# EAGLE board expansion-sn76489-kempton-sd-rev4 (EAGLE 9.6.2)
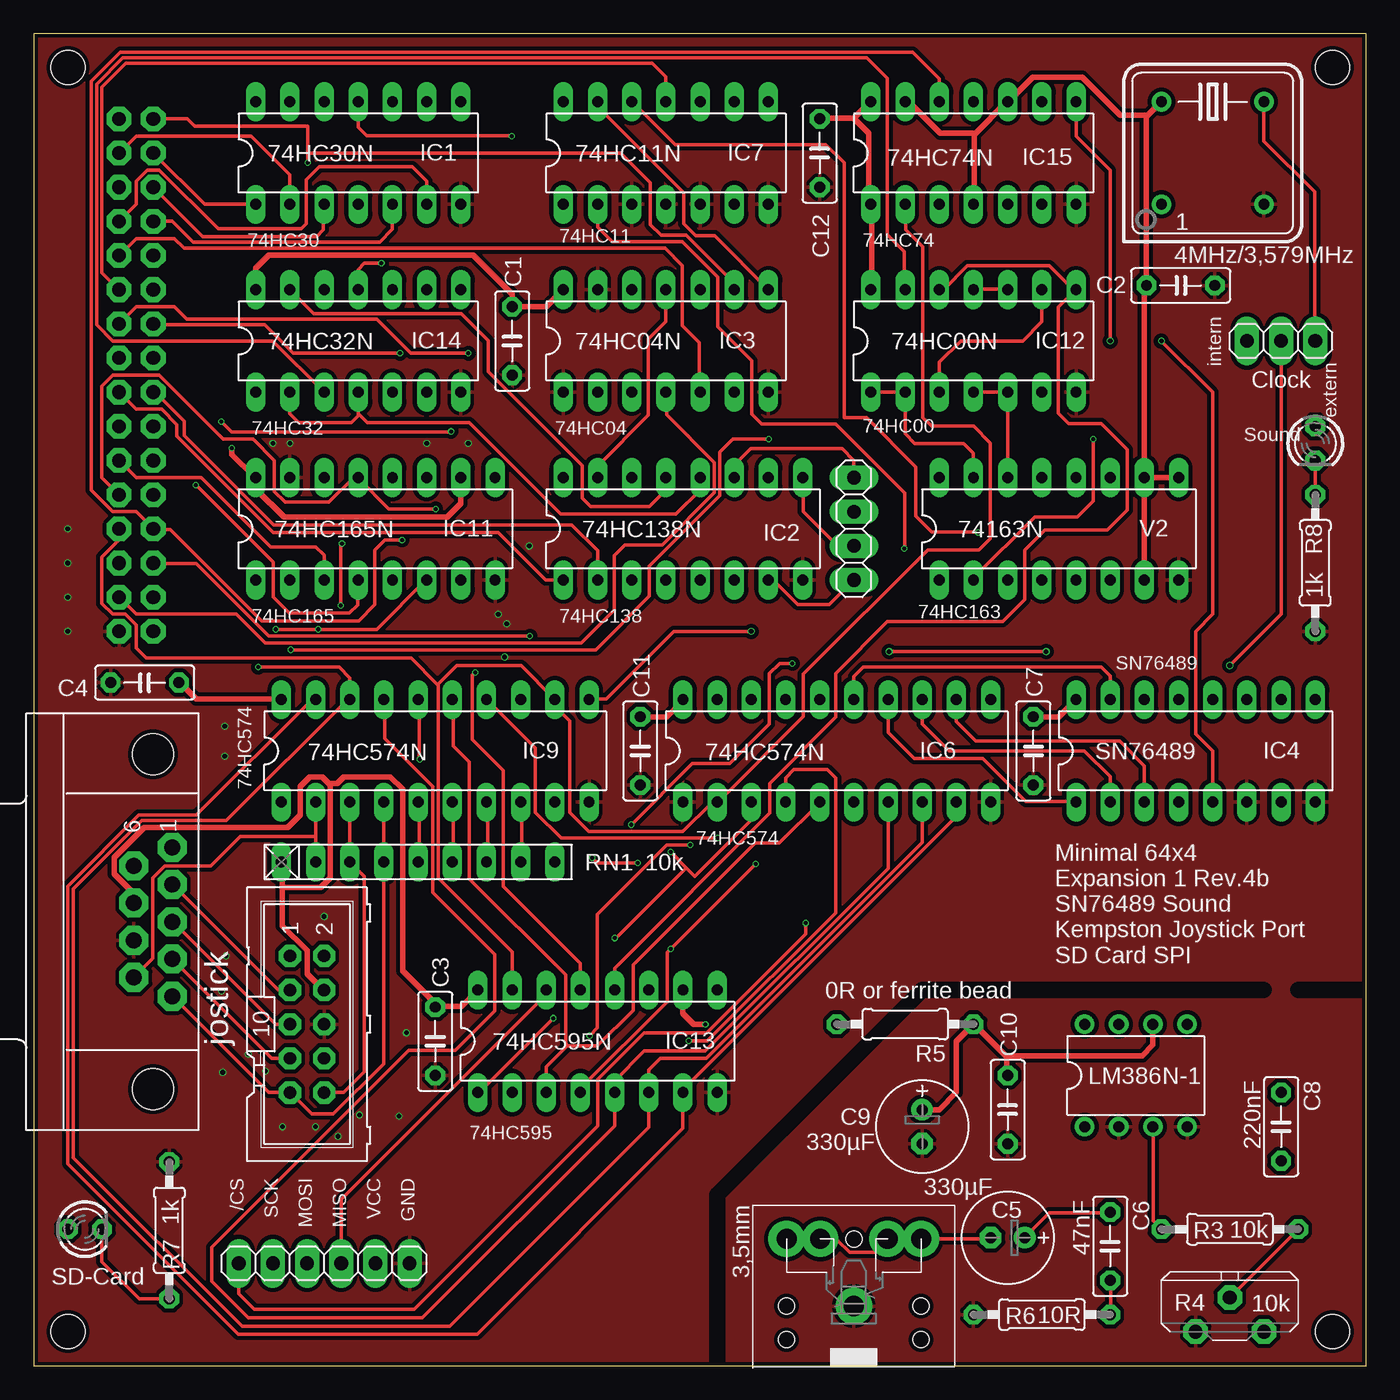
[diagram p0: board, top side]
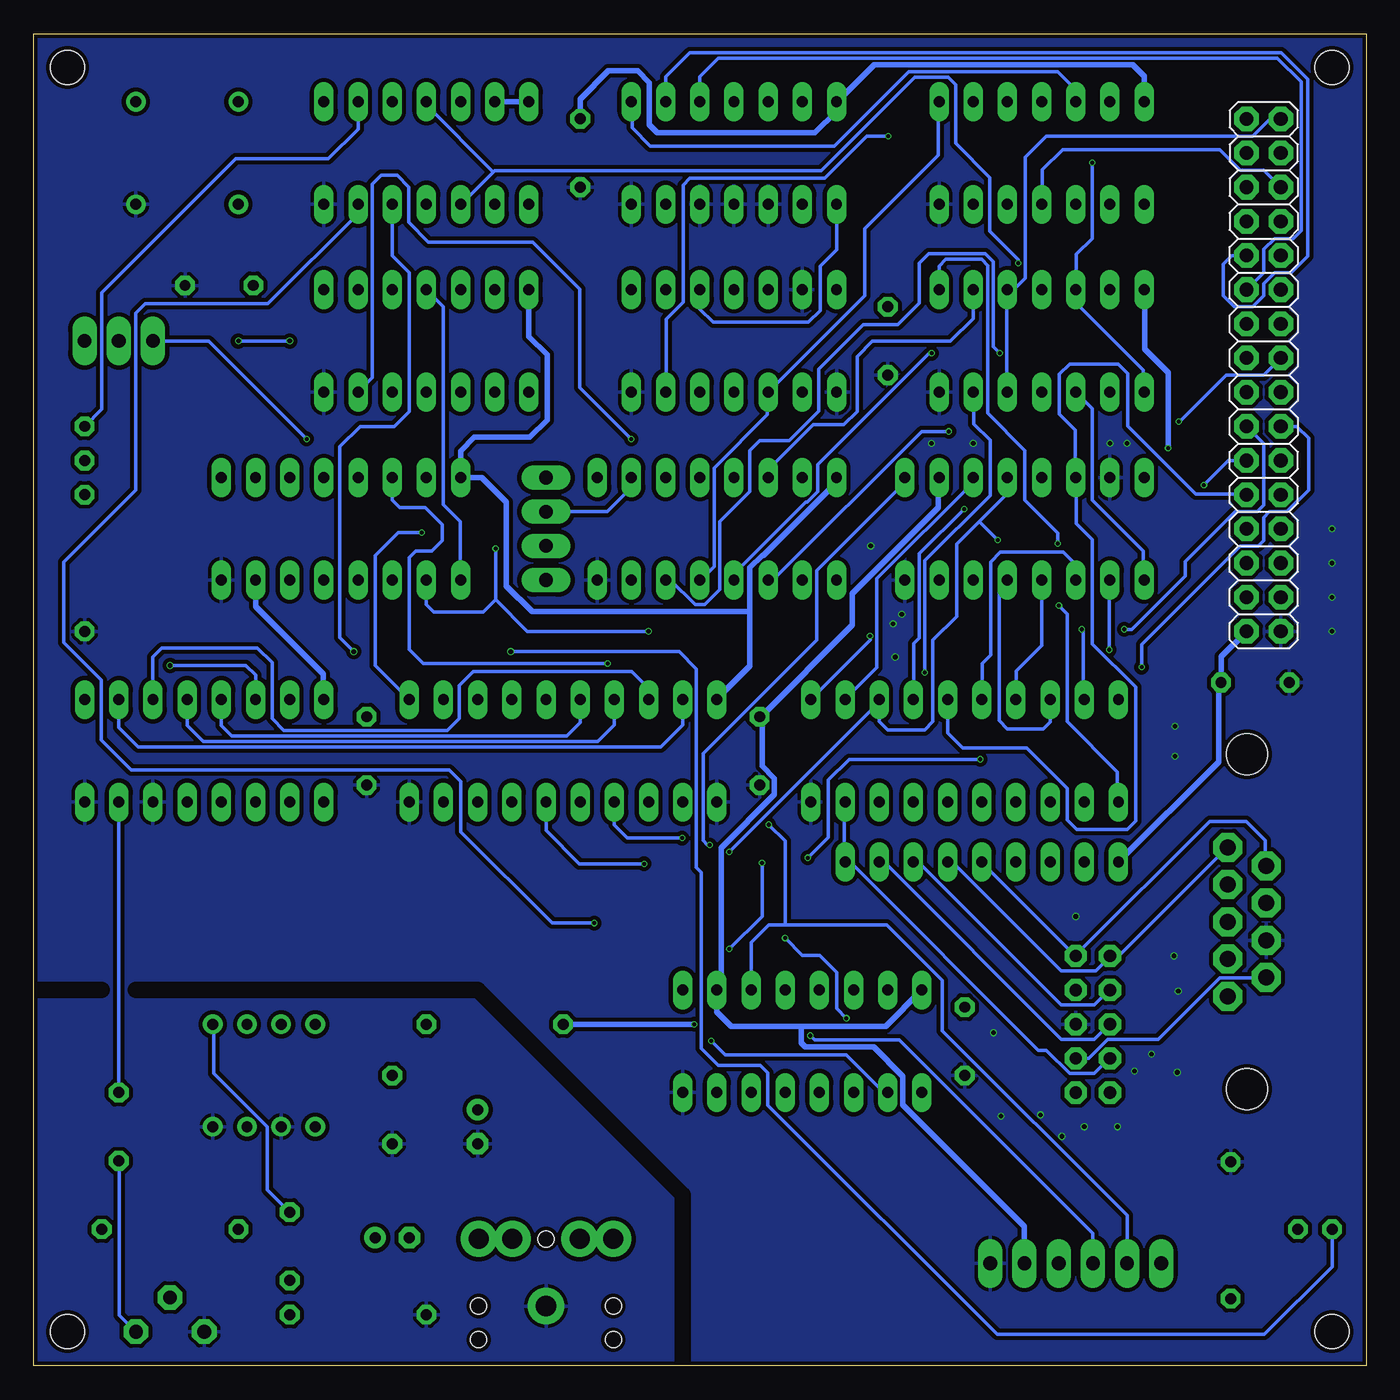
[diagram p1: board, bottom side, seen from below]

Size 99.04 x 99.05 mm. Coordinates in mm from the lower left corner, seen from the top.
Outline: 0,0 99.04,0 99.04,99.05 0,99.05 0,0
Copper layers (1*16): Top 0.035mm / dielectric 1.6mm / Bottom 0.035mm
Design rules "jlcpcb-2layers": minimum track width 5mil, minimum drill 0.3mm, track to track 5mil, track to pad 5mil, pad to pad 5mil, via to via 5mil, smd to smd 5mil, copper to edge 0.2mm, drill to drill 6mil, minimum pad ring 10mil, minimum via ring 3mil, stop-mask expansion 4mil, vias tented up to drill 0mil, thermal gap 10mil
Net classes: 0 default: width 0.254 mm, clearance 0.152 mm; 1 power: width 0.406 mm, clearance 0.152 mm
Holes 2.54 mm at 2.54,2.54 2.54,96.52 96.52,2.54 96.52,96.52
tRestrict: 4 lines
bRestrict: 4 lines

## Footprints (pad centres in the part's own frame; a part is rotated, then mirrored left to right if it is on the bottom)
C050-025X075 = drill 0.813 octagon: 1 -2.54,0; 2 2.54,0
E2,5-7 = drill 0.813 pad 1.6: + -1.27,0 | drill 0.813 pad 1.6 octagon: - 1.27,0
DIL14 = drill 0.813 long: 1 -7.62,-3.81; 2 -5.08,-3.81; 3 -2.54,-3.81; 4 0,-3.81; 5 2.54,-3.81; 6 5.08,-3.81; 7 7.62,-3.81; 8 7.62,3.81; 9 5.08,3.81; 10 2.54,3.81; 11 0,3.81; 12 -2.54,3.81; 13 -5.08,3.81; 14 -7.62,3.81
DIL16 = drill 0.813 long: 1 -8.89,-3.81; 2 -6.35,-3.81; 3 -3.81,-3.81; 4 -1.27,-3.81; 5 1.27,-3.81; 6 3.81,-3.81; 7 6.35,-3.81; 8 8.89,-3.81; 9 8.89,3.81; 10 6.35,3.81; 11 3.81,3.81; 12 1.27,3.81; 13 -1.27,3.81; 14 -3.81,3.81; 15 -6.35,3.81; 16 -8.89,3.81
ALEX-PARTS_DIL16 = drill 0.813 long: 1 -8.89,-3.81; 2 -6.35,-3.81; 3 -3.81,-3.81; 4 -1.27,-3.81; 5 1.27,-3.81; 6 3.81,-3.81; 7 6.35,-3.81; 8 8.89,-3.81; 9 8.89,3.81; 10 6.35,3.81; 11 3.81,3.81; 12 1.27,3.81; 13 -1.27,3.81; 14 -3.81,3.81; 15 -6.35,3.81; 16 -8.89,3.81
DIL20 = drill 0.813 long: 1 -11.43,-3.81; 2 -8.89,-3.81; 3 -6.35,-3.81; 4 -3.81,-3.81; 5 -1.27,-3.81; 6 1.27,-3.81; 7 3.81,-3.81; 8 6.35,-3.81; 9 8.89,-3.81; 10 11.43,-3.81; 11 11.43,3.81; 12 8.89,3.81; 13 6.35,3.81; 14 3.81,3.81; 15 1.27,3.81; 16 -1.27,3.81; 17 -3.81,3.81; 18 -6.35,3.81; 19 -8.89,3.81; 20 -11.43,3.81
DIL08 = drill 0.813 pad 1.27: 1 -3.81,-3.81; 2 -1.27,-3.81; 3 1.27,-3.81; 4 3.81,-3.81; 5 3.81,3.81; 6 1.27,3.81; 7 -1.27,3.81; 8 -3.81,3.81
2X16 = drill 1.016 octagon: 1 -19.05,-1.27; 2 -19.05,1.27; 3 -16.51,-1.27; 4 -16.51,1.27; 5 -13.97,-1.27; 6 -13.97,1.27; 7 -11.43,-1.27; 8 -11.43,1.27; 9 -8.89,-1.27; 10 -8.89,1.27; 11 -6.35,-1.27; 12 -6.35,1.27; 13 -3.81,-1.27; 14 -3.81,1.27; 15 -1.27,-1.27; 16 -1.27,1.27; 17 1.27,-1.27; 18 1.27,1.27; 19 3.81,-1.27; 20 3.81,1.27; 21 6.35,-1.27; 22 6.35,1.27; 23 8.89,-1.27; 24 8.89,1.27; 25 11.43,-1.27; 26 11.43,1.27; 27 13.97,-1.27; 28 13.97,1.27; 29 16.51,-1.27; 30 16.51,1.27; 31 19.05,-1.27; 32 19.05,1.27
1X04 = drill 1.016 long: 1 -3.81,0; 2 -1.27,0; 3 1.27,0; 4 3.81,0
1X06 = drill 1.016 long: 1 -6.35,0; 2 -3.81,0; 3 -1.27,0; 4 1.27,0; 5 3.81,0; 6 6.35,0
1X03 = drill 1.016 long: 1 -2.54,0; 2 0,0; 3 2.54,0
LED3MM = drill 0.813 octagon: A -1.27,0; K 1.27,0
DIL08S = drill 0.813: 1 -3.81,-3.81; 4 3.81,-3.81; 5 3.81,3.81; 8 -3.81,3.81
0207/10 = drill 0.813 octagon: 1 -5.08,0; 2 5.08,0
PT-10S = drill 1.016 pad 1.778 octagon: 1 -2.54,-1.27; 2 2.54,-1.27; 3 0,1.27
RN-9 = drill 0.813 long: 1 -10.16,0; 2 -7.62,0; 3 -5.08,0; 4 -2.54,0; 5 0,0; 6 2.54,0; 7 5.08,0; 8 7.62,0; 9 10.16,0
ML10 = drill 0.914 octagon: 1 -5.08,-1.27; 2 -5.08,1.27; 3 -2.54,-1.27; 4 -2.54,1.27; 5 0,-1.27; 6 0,1.27; 7 2.54,-1.27; 8 2.54,1.27; 9 5.08,-1.27; 10 5.08,1.27
SJ1-352XN = drill 1.5 pad 2.184: 1 0,0; 2 5,-5; 3 5,5; 10 5,-2.5; 11 5,2.5 | hole 1.2: 5,0; 0,5; 0,-5; -2.5,-5; -2.5,5
182-009-MALE = drill 1.194 pad 1.524 octagon: 1 -5.537,10.923; 2 -2.769,10.923; 3 0,10.923; 4 2.769,10.923; 5 5.537,10.923; 6 -4.153,8.08; 7 -1.384,8.08; 8 1.384,8.08; 9 4.153,8.08 | hole 3.048: -12.446,9.501; 12.446,9.501

## Placement (x,y rotation side)
C1  100nF  [C050-025X075]  35.56,76.2 270 top
C2  100nF  [C050-025X075]  85.25,80.33 0 top
C3  100nF  [C050-025X075]  29.84,24.13 270 top
C4  100nF  [C050-025X075]  8.26,50.8 180 top
C5  330µF  [E2,5-7]  72.39,9.53 180 top
C6  47nF  [C050-025X075]  80.01,8.89 270 top
C7  100nF  [C050-025X075]  74.3,45.72 270 top
C8  220nF  [C050-025X075]  92.71,17.78 270 top
C9  330µF  [E2,5-7]  66.04,17.78 270 top
C10  100nF  [C050-025X075]  72.39,19.05 270 top
C11  100n  [C050-025X075]  45.09,45.72 270 top
C12  100n  [C050-025X075]  58.42,90.17 270 top
IC1  74HC30N  [DIL14]  24.13,90.17 0 top
IC2  74HC138N  [DIL16]  48.26,62.23 0 top
IC3  74HC04N  [DIL14]  46.99,76.2 0 top
IC4  SN76489  [ALEX-PARTS_DIL16]  86.36,45.72 0 top
IC6  74HC574N  [DIL20]  59.69,45.72 0 top
IC7  74HC11N  [DIL14]  46.99,90.17 0 top
IC9  74HC574N  [DIL20]  29.84,45.72 0 top
IC10  LM386N-1  [DIL08]  81.92,21.59 0 top
IC11  74HC165N  [DIL16]  25.4,62.23 0 top
IC12  74HC00N  [DIL14]  69.85,76.2 0 top
IC13  74HC595N  [DIL16]  41.91,24.13 0 top
IC14  74HC32N  [DIL14]  24.13,76.2 0 top
IC15  74HC74N  [DIL14]  69.85,90.17 0 top
JP1  Expansionsport  [2X16]  7.62,73.66 90 bottom
JP2  reseved  [1X04]  60.96,62.23 270 top
JP3  SD-Card  [1X06]  21.59,7.62 180 top
JP6  Clock  [1X03]  92.71,76.2 180 top
LED1  3mm  [LED3MM]  3.81,10.16 0 top
LED2  3mm  [LED3MM]  95.25,68.58 270 top
QG2  4MHz/3,579MHz  [DIL08S]  87.63,90.17 0 top
R3  10k  [0207/10]  88.9,10.16 180 top
R4  10k  [PT-10S]  88.9,3.81 0 top
R5  0R or ferrite bead  [0207/10]  64.77,25.4 180 top
R6  10R  [0207/10]  74.93,3.81 0 top
R7  1k  [0207/10]  10.08,10.08 270 top
R8  1k  [0207/10]  95.25,59.69 90 top
RN1  10k  [RN-9]  28.57,37.47 0 top
SV1  joystick  [ML10]  20.32,25.4 270 top
V2  74163N  [DIL16]  76.2,62.23 0 top
X2  AUX1  [SJ1-352XN]  60.96,4.45 90 top
X3  jostick  [182-009-MALE]  -0.64,33.02 270 top

## Library data of the parts
C1-C12 = rcl; SPICEPREFIX: C
IC1-IC3 IC6 IC7 IC9 IC11-IC15 = 74xx-eu
IC4 = squareinator2
IC10 = linear
JP1-JP3 JP6 = pinhead
LED1 LED2 = led
QG2 = crystal; OC_FARNELL: unknown; OC_NEWARK: unknown
R3 R5-R8 = rcl; SPICEPREFIX: R
R4 = rcl; SPICEMODEL: POT; SPICEPREFIX: X
RN1 = resistor-net; OC_FARNELL: unknown; OC_NEWARK: unknown
SV1 = con-harting-ml; OC_FARNELL: unknown; OC_NEWARK: unknown
V2 = 74ttl-din
X2 = con-sj1-352xn
X3 = con-subd; OC_FARNELL: unknown; OC_NEWARK: unknown

## Nets
4MHZ: JP6.1 QG2.5
/CS_SD: IC15.6 JP3.6
/FEC0-FEFF_/INH: IC1.8 IC2.5 IC3.3
/RD595: IC13.13 IC14.6
/RES: JP1.5
/RI_/WR: IC3.9 IC14.1 IC14.12 JP1.32
/RO_/RD: IC14.5 IC14.10 JP1.31
/WR_165: IC11.1 IC12.13 IC14.3
A0: IC2.1 JP1.15
A1: IC2.2 JP1.16
A2: IC2.3 JP1.17
A3: JP1.18
A4: IC2.4 JP1.19
A5: IC2.6 JP1.20
A6: IC7.11 JP1.21
A7: IC7.10 JP1.22
A8: IC3.5 JP1.23
A9: IC7.9 JP1.24
A10: IC1.6 JP1.25
A11: IC1.5 JP1.26
A12: IC1.4 JP1.27
A13: IC1.3 JP1.28
A14: IC1.2 JP1.29
A15: IC1.1 JP1.30
AIN: C8.2 R4.2
AUDIO: C8.1 IC4.7
AUXOUT1: C5.- X2.2 X2.3 X2.10 X2.11
AVCC [power]: C9.+ C10.1 IC10.6 R5.1
CLK: IC7.2 IC9.11 JP1.6 JP6.3 V2.2
CLOCK: IC11.2 IC12.6
D0: IC6.2 IC9.12 IC11.11 IC13.15 IC15.2 JP1.7
D0_RIGHT: IC9.9 RN1.9 SV1.7 X3.4
D1: IC6.3 IC9.13 IC11.12 IC13.1 IC15.12 JP1.8
D1_LEFT: IC9.8 RN1.8 SV1.5 X3.3
D2: IC6.4 IC9.14 IC11.13 IC13.2 JP1.9
D2_DOWN: IC9.7 RN1.7 SV1.3 X3.2
D3: IC6.5 IC9.15 IC11.14 IC13.3 JP1.10
D3_UP: IC9.6 RN1.6 SV1.1 X3.1
D4: IC6.6 IC9.16 IC11.3 IC13.4 JP1.11
D4_FIRE1: IC9.5 RN1.5 SV1.2 X3.6
D5: IC6.7 IC9.17 IC11.4 IC13.5 JP1.12
D5_FIRE3: IC9.4 RN1.4 SV1.9 X3.5
D6: IC6.8 IC9.18 IC11.5 IC13.6 JP1.13
D7: IC6.9 IC9.19 IC11.6 IC13.7 JP1.14
D7_FIRE2: IC9.2 RN1.2 SV1.8 X3.9
FEE0: IC2.15 IC3.11
FEE1: IC2.14 IC14.9
FEE2: IC2.13 IC14.13
FEE3: IC2.12 IC14.2 IC14.4
FEE4: IC2.11 JP2.1
FEE5: IC2.10 JP2.2
FEE6: IC2.9 JP2.3
FEE7: IC2.7 JP2.4
GND [power]: C1.2 C2.2 C3.2 C4.2 C7.2 C9.- C10.2 C11.2 C12.2 IC1.7 IC2.8 IC3.1 IC3.7 IC3.13 IC4.6 IC4.8 IC6.1 IC6.10 IC7.3 IC7.4 IC7.5 IC7.7 IC9.10 IC10.2 IC10.4 IC11.8 IC11.15 IC12.7 IC13.8 IC14.7 IC15.7 JP1.1 JP3.1 QG2.4 R4.1 R6.1 R7.1 R8.1 SV1.6 V2.8 X2.1 X3.8
IN6: IC9.3 RN1.3 SV1.10
INH: IC3.4 JP1.3
INPUT_EN: IC9.1 IC14.8
LED_SD: IC15.5 LED1.A
LED_SN76489: IC15.9 LED2.A
MISO: IC13.14 JP3.3
MOSI: IC11.9 JP3.4
N$1: LED2.K R8.2
N$2: IC3.10 IC7.1
N$3: IC1.12 IC7.8
N$6: C6.2 R6.2
N$7: IC12.1 IC12.2 V2.15
N$8: R3.1 R4.3
N$9: IC12.10 IC12.11 V2.1
N$10: IC12.3 IC12.9
N$11: IC14.11 IC15.3 IC15.11
N$12: LED1.K R7.2
N$14: IC4.5 IC15.8
N$19: IC1.11 IC3.6
N/C: JP1.4
OV_IN: IC10.3 R3.2
R2C2C3: C5.+ C6.1 IC10.5
RI_WR: IC3.8 IC7.13
SCLK: IC4.14 JP6.2
SD_CLK: IC12.4 IC12.5 IC13.11 JP3.5 V2.14
SET595: IC12.8 IC12.12 IC13.12
SND0: IC4.10 IC6.19
SND1: IC4.11 IC6.18
SND2: IC4.12 IC6.17
SND3: IC4.13 IC6.16
SND4: IC4.15 IC6.15
SND5: IC4.1 IC6.14
SND6: IC4.2 IC6.13
SND7: IC4.3 IC6.12
SOUND_EN: IC6.11 IC7.12
VCC [power]: C1.1 C2.1 C3.1 C4.1 C7.1 C11.1 C12.1 IC1.14 IC2.16 IC3.14 IC4.16 IC6.20 IC7.14 IC9.20 IC11.10 IC11.16 IC12.14 IC13.10 IC13.16 IC14.14 IC15.1 IC15.4 IC15.10 IC15.13 IC15.14 JP1.2 JP3.2 QG2.8 R5.2 RN1.1 SV1.4 V2.7 V2.9 V2.10 V2.16 X3.7

## Tracks (layer width: path | path; a pad name or v marks a point on that pad's centre or on a via)
4MHZ
  Top 0.254: QG2.5 91.44,91.06 95.2,87.3 95.2,76.2 JP6.1
/CS_SD  (via drill 0.3)
  Top 0.254: v57.38,32.91 57.38,32.11 50.01,24.74 45.37,24.74 41.91,21.29 41.91,17.84 28.29,4.22 16.4,4.22 15.24,5.38 JP3.6
  Bottom 0.254: IC15.6 74.93,85.66 81.62,78.97 90.73,78.97 91.44,78.26 91.44,65.1 96.79,59.75 96.79,53.78 94.02,51.01 94.02,46.54 91.78,44.3 68.15,44.3 67.29,43.44 67.29,39.71 60.5,32.91 v57.38,32.91
/FEC0-FEFF_/INH
  Bottom 0.254: IC2.5 49.48,58.42 48.46,59.44 48.46,66.75 44.5,70.71 44.5,72.34 IC3.3 37.27,79.57 37.27,84.53 31.8,90 31.8,93.98 IC1.8
/RD595  (via drill 0.3)
  Top 0.254: v32.82,51.56 32.61,51.36 32.61,46.56 34.91,44.26 34.91,35.64 40.64,29.91 IC13.13
  Bottom 0.254: v32.82,51.56 32.82,59.85 27.95,64.72 27.95,68.83 29.16,70.03 29.16,72.34 IC14.6
/RI_/WR  (via drill 0.3)
  Top 0.254: JP1.32 11.43,92.71 11.99,92.15 20.36,92.15 20.36,90.17 | IC3.9 52.02,80.06 52.02,80.52 48.49,84.06 46.63,84.06 45.83,84.86 45.83,87.95 43.62,90.17 20.36,90.17 | 20.36,90.17 v20.36,89.44
  Bottom 0.254: IC14.1 16.56,72.44 16.56,74.03 21.59,79.06 IC14.12 21.54,80.06 21.54,82.64 20.36,83.81 v20.36,89.44
/RO_/RD
  Bottom 0.254: IC14.5 26.72,72.44 26.72,79.96 IC14.10 26.19,80.01 25.34,80.86 25.34,89.87 23.77,91.44 8.43,91.44 7.21,92.66 6.4,92.66 JP1.31
/WR_165
  Top 0.254: IC14.3 17.78,76.2 5.89,76.2 4.67,77.42 4.67,95.3 6.63,97.26 61.93,97.26 63.46,95.73 63.46,84.11 64.72,82.84 64.72,80.06 IC12.13
  Bottom 0.254: IC14.3 20.36,71.16 20.36,64.38 16.56,60.57 16.56,58.42 IC11.1
A0
  Top 0.254: IC2.1 38.06,58.42 34.53,61.95 17.8,61.95 10.64,69.12 10.64,69.99 9.51,71.12 7.62,71.12 JP1.15
A1
  Top 0.254: IC2.2 41.91,60.6 40,62.52 17.85,62.52 11.2,69.16 11.2,70.24 9.05,72.39 JP1.16
A2  (via drill 0.3)
  Top 0.254: v31.02,69.47 30.96,69.41 14.73,69.41 v13.93,70.21
  Bottom 0.254: IC2.3 44.09,58.42 33.04,69.47 v31.02,69.47 | v13.93,70.21 13.85,70.21 10.4,73.66 7.62,73.66 JP1.17
A4  (via drill 0.3)
  Top 0.254: v32.31,75.29 28.04,75.29 25.5,77.83 11.37,77.83 10.46,78.74 7.62,78.74 JP1.19
  Bottom 0.254: v32.31,75.29 32.47,75.29 40.75,67 40.75,65.01 41.55,64.21 41.66,64.21 46.94,58.93 46.94,58.42 IC2.4
A5  (via drill 0.3)
  Top 0.254: v27.23,75.29 19.3,75.29 17.17,77.42 8.94,77.42 JP1.20
  Bottom 0.254: IC2.6 51.71,58.42 49.89,56.59 49.17,56.59 48.06,57.71 48.06,62.79 45.83,65.01 45.83,68.03 45.08,68.79 42.88,68.79 40.67,70.99 40.67,74.11 37.38,77.41 34.81,77.41 33.21,79.01 33.21,81.97 32.52,82.67 28.31,82.67 27.74,82.1 27.74,75.79 v27.23,75.29
A6
  Top 0.254: IC7.11 46.99,95.85 45.99,96.85 6.86,96.85 5.08,95.07 5.08,81.28 JP1.21
A7
  Bottom 0.254: IC7.10 49.53,95.85 48.15,97.23 6.6,97.23 4.84,95.47 4.84,84.39 5.42,83.82 6.81,83.82 7.62,83.01 7.62,81.28 JP1.22
A8
  Top 0.254: JP1.23 7.62,83.82 10.46,83.82 11.19,83.09 46.94,83.09 48.22,81.81 48.22,77.34 49.48,76.08 49.48,72.44 IC3.5
A9
  Bottom 0.254: IC7.9 52.07,95.85 50.28,97.64 6.32,97.64 4.36,95.67 4.36,82.5 5.58,81.28 6.81,81.28 7.62,80.47 7.62,79.55 8.43,78.74 9.82,78.74 10.64,79.55 10.64,81.92 10,82.55 JP1.24
A10
  Top 0.254: IC1.6 29.21,88.07 28.14,89.14 21.23,89.14 20.28,88.18 20.28,84.92 19.88,84.53 13.72,84.53 9.35,88.9 8.43,88.9 7.62,88.09 7.62,86.36 JP1.25
A11
  Top 0.254: IC1.5 26.67,84.49 25.74,83.56 11.85,83.56 10.32,85.09 JP1.26
A12
  Bottom 0.254: JP1.27 7.62,88.9 9.35,88.9 10.87,90.42 22.57,90.42 24.08,88.92 24.08,86.36 IC1.4
A13
  Top 0.254: JP1.28 12.55,83.97 21.04,83.97 21.54,84.47 21.54,86.36 IC1.3
A14
  Top 0.254: IC1.2 19.05,88.54 16.15,91.44 7.62,91.44 JP1.29
A15
  Top 0.254: IC1.1 12.7,86.36 JP1.30
AIN
  Bottom 0.254: R4.2 92.66,3.76 92.66,15.24 C8.2
AUDIO
  Bottom 0.254: C8.1 IC4.7
AUXOUT1
  Top 0.254: X2.3 55.98,9.45 58.42,9.45 X2.11 58.52,9.35 59.74,9.35 60.66,8.43 62.48,8.43 63.4,9.35 X2.10 63.5,9.45 65.84,9.45 X2.2 66.04,9.45 71.12,9.45 C5.-
AVCC
  Top 0.406: 72.34,22.96 72.34,21.64 C10.1 | 72.34,22.96 69.9,25.4 R5.1 68.58,24.13 68.58,20.32 67.31,19.05 C9.+ | IC10.6 83.19,23.85 82.4,23.06 72.44,23.06 72.34,22.96
CLK  (via drill 0.3, 0.35)
  Top 0.254: v64.71,60.76 64.75,60.73 64.75,64.9 59.62,70.02 54.11,70.02 53.38,70.75 53.38,74.74 50.84,77.28 50.84,80.93 48.2,83.57 42.99,83.57 41.91,84.65 IC7.2 | IC9.11 41.35,49.58 42.55,49.58 47.57,54.6 53.33,54.6 v53.34,54.61 | v36.88,54.25 17.48,54.25 12.09,59.64 8.94,59.64 JP1.6 | v78.75,68.92 78.75,64.29 77.57,63.11 74.38,63.11 69.85,58.57 V2.2
  Bottom 0.254: v36.88,54.25 36.88,53.95 41.25,49.58 IC9.11 | JP6.3 86.04,76.2 v78.75,68.92 | V2.2 69.85,56.59 69.29,56.04 65.64,56.04 64.71,56.97 | 64.71,56.97 v64.71,60.76 | 64.71,56.97 62.35,54.61 v53.34,54.61
CLOCK  (via drill 0.3)
  Top 0.254: v19.1,53.24 41.77,53.24 45.76,57.23 45.76,59.48 51,64.72 51,67.95 51.96,68.9 v54.63,68.9
  Bottom 0.254: v19.1,53.24 19.1,58.42 IC11.2 | v54.63,68.9 58.46,72.74 58.46,80.07 61.94,83.55 69.7,83.55 71.16,85.01 71.16,87.64 72.03,88.51 73.22,88.51 73.86,87.86 73.86,73.46 IC12.6
D0
  Top 0.254: IC13.15 35.56,30.79 30.07,36.27 30.07,50.7 | 30.07,50.7 31.44,52.07 36.22,52.07 38.71,49.58 IC9.12 38.81,49.48 38.81,48.97 39.83,47.95 39.83,41.15 41.25,39.73 48.26,39.73 50.39,41.86 50.8,41.86 IC6.2 50.9,41.96 57.21,48.27 57.21,51.42 66.43,60.65 70.26,60.65 71.11,61.5 71.11,68.61 69.87,69.85 66.74,69.85 66.08,70.51 66.08,83.2 64.82,84.46 64.82,86.36 IC15.2 | JP1.7 6.3,62.18 6.3,61.37 5.08,60.15 5.08,56.69 5.89,55.88 6.81,55.88 7.62,55.07 7.62,53.36 8.37,52.61 28.06,52.61 29.97,50.7 30.07,50.7
  Bottom 0.254: IC11.11 29.26,66.04 29.26,65.63 36.37,58.52 36.37,51.92 38.71,49.58 IC9.12
D0_RIGHT
  Top 0.254: SV1.7 17.68,22.86 10.36,30.18 X3.4
  Bottom 0.254: IC9.9 38.81,41.86 38.81,37.49 RN1.9 38.61,37.49 38.41,37.49 24.38,23.47 23.77,23.47 22.05,21.74 20.22,21.74 19.1,22.86 SV1.7
D1  (via drill 0.3)
  Top 0.254: v38.63,25.85 33.1,20.32 IC13.1 | v43.2,31.8 43.28,31.8 48.51,37.03 | IC6.3 53.34,40.59 49.15,36.4 48.51,37.03 | 48.51,37.03 v47.35,38.2 | IC15.12 67.31,95.69 65.33,97.66 6.43,97.66 4.27,95.5 4.27,65.13 5.89,63.5 7.62,63.5 JP1.8 8.94,62.18 10.16,62.18 16.95,55.39 24.16,55.39 25.36,56.59 25.36,60.64 26.11,61.39 v27.38,61.39
  Bottom 0.254: 28.76,62.78 26.72,64.82 26.72,66.04 IC11.12 | 28.76,62.78 30.44,61.11 30.44,55.72 32.21,53.95 32.21,47.9 32.83,47.28 35.57,47.28 36.2,47.9 IC9.13 36.17,49.38 v47.35,38.2 | v43.2,31.8 41.93,30.53 40.62,30.53 39.34,29.25 39.34,26.57 v38.63,25.85 | v27.38,61.39 28.76,62.78
D1_LEFT
  Top 0.254: RN1.8 36.27,37.49 36.27,41.86 IC9.8 | SV1.5 17.98,25.4 10.36,33.02 X3.3
  Bottom 0.254: RN1.8 36.17,37.39 35.76,37.39 22.66,24.28 20.22,24.28 19.1,25.4 SV1.5
D2  (via drill 0.3)
  Top 0.254: v48.68,24.16 50.06,24.16 59.59,33.69 59.59,43.71 58.98,44.32 56.5,44.32 55.88,43.71 IC6.4 | JP1.9 5.08,66.04 5.08,72.85 5.89,73.66 9.35,73.66 14.1,68.9 16.31,68.9 17.89,67.32 17.89,65.01 18.69,64.21 21.95,64.21 23.77,66.04 IC11.13 24.18,65.94 26.41,63.71 v29.89,63.71 | v50.85,39.24 39.2,39.24 37.29,41.15 37.29,45.92 33.73,49.48 IC9.14
  Bottom 0.254: IC13.2 35.87,20.32 38.66,23.12 47.64,23.12 v48.68,24.16 | v29.89,63.71 33.22,60.38 33.22,54.13 33.63,53.72 33.63,49.58 IC9.14 | IC6.4 55.88,40.2 54.91,39.24 v50.85,39.24
D2_DOWN
  Top 0.254: RN1.7 33.73,37.49 33.73,41.86 IC9.7 | SV1.3 18.19,27.94 10.36,35.76 X3.2
  Bottom 0.254: RN1.7 33.63,37.39 33.22,37.39 22.66,26.82 20.22,26.82 19.1,27.94 SV1.3
D3
  Top 0.254: IC13.3 38.1,22.21 39.68,23.79 | 39.68,23.79 39.69,23.81 39.53,23.96 39.53,29.06 32.38,36.22 32.38,44.9 31.19,46.08 31.19,49.48 IC9.15 | IC6.5 58.42,41.86 55.42,38.86 53.61,38.86 44.55,29.79 44.55,26.43 41.9,23.79 39.68,23.79
  Bottom 0.254: JP1.10 8.94,64.82 12.68,64.82 17.74,69.87 17.74,73.79 18.43,74.49 22.05,74.49 22.82,73.72 22.82,70.75 21.64,69.57 21.64,66.04 IC11.14 21.54,65.94 21.54,62.62 20.36,61.43 20.36,53.68 17.14,50.46 17.14,40.5 17.75,39.89 21.52,39.89 22.21,40.59 22.21,42.92 25.22,45.93 30,45.93 31.11,47.04 IC9.15
D3_UP
  Top 0.254: RN1.6 31.19,37.49 31.19,41.86 IC9.6
  Bottom 0.254: X3.1 10.36,38.51 18.39,30.48 SV1.1 19.1,30.38 20.12,29.36 22.66,29.36 30.68,37.39 31.09,37.39 RN1.6
D4  (via drill 0.3)
  Top 0.254: IC11.3 21.59,60.27 20.98,60.88 17.63,60.88 12.47,66.04 7.64,66.04 6.42,67.26 6.4,67.26 JP1.11 | IC13.4 40.64,20.62 47.09,27.07 47.09,30.75 47.33,30.99 v47.35,30.99 47.35,31.01 v53.67,37.33 | v28.69,45.1 28.65,45.14 28.65,49.48 IC9.16 | v44.91,37.39 v44.9,37.38 41.91,37.38 v41.51,37.78
  Bottom 0.254: IC11.3 21.59,59.56 22.52,60.49 27.18,60.49 27.9,59.78 27.9,52.87 28.55,52.21 28.55,49.58 IC9.16 | v53.67,37.33 58.5,37.33 60.96,39.8 IC6.6 | v28.69,45.1 38.44,45.1 39.99,43.55 39.99,39.3 v41.51,37.78 | v44.91,37.39 44.91,33.43 v47.35,30.99
D4_FIRE1
  Top 0.254: RN1.5 28.65,37.49 28.65,41.86 IC9.5
  Bottom 0.254: RN1.5 28.55,37.39 21.64,30.48 SV1.2 21.54,30.58 11.64,40.48 8.94,40.48 7.52,39.06 7.52,37.19 X3.6
D5  (via drill 0.3)
  Top 0.254: v12.06,65.49 12.1,65.49 17.82,59.77 17.82,57.14 19.01,55.96 23.47,55.96 24.08,56.56 24.08,58.42 IC11.4 | IC6.7 63.5,36.98 49.93,23.41 45.38,23.41 43.18,21.21 IC13.5 43.18,17.86 28.89,3.57 15.93,3.57 13.23,6.28 13.23,8.8 27.87,23.45 31.32,23.45 34.27,26.4 34.27,30.59 29.67,35.2 29.67,43.08 26.11,46.63 26.11,49.48 IC9.17
  Bottom 0.254: IC11.4 24.13,53.55 26.01,51.67 26.01,49.58 IC9.17 | v12.06,65.49 10.24,67.31 JP1.12
D5_FIRE3
  Top 0.254: IC9.4 RN1.4 26.01,37.39 26.01,22.45 22.29,18.73 20.67,18.73 19.08,20.32 SV1.9 17.48,20.32 10.36,27.43 X3.5
D6  (via drill 0.3)
  Top 0.254: v16.69,51.94 22.7,51.94 23.5,51.14 IC9.18 23.37,49.58 14.33,40.54 8.03,40.54 2.95,35.46 2.95,15.47 15.49,2.93 30.92,2.93 45.72,17.72 IC13.6 45.72,22 46.56,22.84 49.97,22.84 66.04,38.91 IC6.8
  Bottom 0.254: IC9.18 23.5,47.88 24.02,47.35 26.68,47.35 27.29,47.97 27.29,57.85 26.72,58.42 IC11.5 | JP1.13 5.16,69.85 4.29,68.98 4.29,65.11 5.89,63.5 7.2,63.5 7.62,63.08 7.62,61.38 8.04,60.96 9.35,60.96 16.69,53.61 v16.69,51.94
D7  (via drill 0.3)
  Top 0.254: IC11.6 29.16,58.42 25.5,54.76 v21.15,54.76 v17.98,54.76 | IC6.9 68.58,40.84 48.26,20.52 IC13.7 48.26,17.64 32.98,2.36 15.21,2.36 2.54,15.03 2.54,35.66 7.82,40.95 12.09,40.95 20.62,49.48 20.93,49.48 IC9.19
  Bottom 0.254: v21.15,54.76 21.03,54.64 21.03,49.58 IC9.19 | JP1.14 7.62,68.58 7.62,63.99 8.12,63.5 9.74,63.5 13.46,59.78 13.46,58.73 17.43,54.76 v17.98,54.76
D7_FIRE2
  Top 0.254: IC9.2 20.95,39.38 | RN1.2 20.95,39.38 | 20.95,39.38 15.36,39.38 13.17,37.19 9.75,37.19 8.84,36.27 8.84,30.28 7.52,28.96 X3.9
  Bottom 0.254: SV1.8 20.62,22.86 19.2,24.28 15.44,24.28 10.87,28.85 7.52,28.85 X3.9
FEE0
  Top 0.254: IC3.11 46.99,77.63 45.69,76.32 45.69,70.67 41.96,66.95 41.96,66.04 IC2.15
FEE1
  Bottom 0.254: IC2.14 44.45,66.64 41.11,69.98 38.83,69.98 37.85,70.96 37.85,75.04 36.72,76.17 30.91,76.17 29.21,77.87 IC14.9
FEE2
  Top 0.254: IC2.13 46.99,65.13 45.76,63.89 41.4,63.89 40.75,64.53 40.75,66.94 33.77,73.93 33.77,76.22 31.76,78.23 20.83,78.23 IC14.13
FEE3
  Top 0.254: IC14.2 19.05,70.8 19.72,70.14 23.62,70.14 24.13,70.64 IC14.4 24.13,70.8 24.8,70.14 32.38,70.14 39.19,63.33 47.73,63.33 49.53,65.13 IC2.12
FEE4
  Top 0.254: IC2.11 52.07,66.95 53.3,68.19 60.08,68.19 60.96,67.31 JP2.1
FEE5
  Bottom 0.254: IC2.10 54.61,65.28 56.39,63.5 JP2.2
FEE6
  Top 0.254: JP2.3 59.75,60.96 57.2,63.51 57.2,66.04 IC2.9
FEE7
  Top 0.254: IC2.7 54.97,58.42 56.79,56.59 59.13,56.59 JP2.4
GND  (via drill 0.35)
  other vias: 19.05,68.58 17.78,68.58 29.21,68.58 32.31,68.58 34.53,55.88 35.16,55.17 36.83,60.96 35,52.7 27.7,24.77 17.22,21.91 14.05,21.83 18.49,17.78 20.95,17.78 21.59,33.42 15.95,23.18 13.97,27.86 14.29,30.48 14.21,45.32 14.21,47.55 2.54,54.61 2.54,57.15 2.54,59.69 2.54,62.23 22.62,17.07 24.21,18.65 27.15,18.57
  pour Bottom (isolate 0.305): 0,99.06 0,0 99.06,0 99.06,99.06
  pour Top (isolate 0.305): 0,99.06 0,0 100.33,0 100.33,99.06
IN6
  Top 0.254: IC9.3 RN1.3 24.59,36.37 24.59,21.86 23.04,20.32 SV1.10
INH
  Top 0.254: JP1.3 7.62,55.88 15.06,55.88 17.2,53.75 40.69,53.75 43.14,56.19 43.14,60.24 43.94,61.04 46.72,61.04 50.6,64.92 50.6,67.16 47.04,70.71 47.04,72.34 IC3.4
INPUT_EN  (via drill 0.3)
  Top 0.254: v22.92,61.14 22.84,61.06 v22.84,56.53
  Bottom 0.254: v22.84,56.53 22.21,55.91 22.21,47.9 18.49,44.17 18.49,41.96 IC9.1 | v22.92,61.14 22.92,61.93 25.36,64.38 25.36,68.06 28.14,70.83 28.14,81.81 28.59,82.26 31.24,82.26 31.75,81.76 IC14.8
LED_SD  (via drill 0.35)
  Top 0.254: v75.25,53.1 v63.58,53.1
  Bottom 0.254: LED1.A 2.54,7.37 7.57,2.34 27.43,2.34 44.47,19.37 44.47,21.78 45.04,22.35 48.16,22.35 49.42,23.61 49.42,36.68 49.78,37.04 49.78,51.81 51.08,53.1 v63.58,53.1 | IC15.5 72.39,82.55 71.12,81.28 71.12,70.96 72.23,69.85 74.77,69.85 76.28,68.34 76.28,54.13 v75.25,53.1
LED_SN76489
  Bottom 0.254: IC15.9 74.93,91.95 77.13,89.76 84.01,89.76 93.98,79.79 93.98,71.12 LED2.A
MISO
  Top 0.254: IC13.14 38.1,27.64 22.86,12.39 JP3.3
MOSI  (via drill 0.3)
  Top 0.254: v48.8,38.73 47.06,38.73 41.89,33.56 41.89,25.13 v41.31,24.55
  Bottom 0.254: v48.8,38.73 48.96,38.73 49.28,39.05 49.28,45.52 40.84,53.95 40.84,59.13 34.34,65.63 34.34,66.04 IC11.9 | v41.31,24.55 41,24.23 34.7,24.23 20.32,9.86 JP3.4
N$1
  Top 0.254: R8.2 LED2.K
N$2
  Bottom 0.254: IC3.10 49.53,78.58 48.55,77.6 41.45,77.6 40.6,78.45 40.6,81.77 39.37,83 IC7.1
N$3
  Bottom 0.254: IC1.12 21.59,94.89 22.91,96.22 34,96.22 39.52,90.69 53.21,90.69 54.56,92.04 54.56,93.98 IC7.8
N$6
  Top 0.254: R6.2 80.06,3.86 80.06,6.3 C6.2
N$7
  Top 0.254: V2.15 69.85,67.87 69.14,68.58 65.48,68.58 64.77,69.29 IC12.2 IC12.1
N$8
  Top 0.254: R4.3 R3.1
N$9
  Top 0.254: IC12.10 72.34,80.06 69.9,80.06 IC12.11
  Bottom 0.254: V2.1 67.32,62.77 68.58,64.04 68.58,78.74 IC12.11
N$10
  Top 0.254: IC12.3 67.31,74.61 68.9,76.2 73.5,76.2 74.93,77.63 IC12.9
N$11  (via drill 0.3)
  Top 0.254: IC14.11 24.13,81.52 24.58,81.97 v25.85,81.97
  Bottom 0.254: v25.85,81.97 25.85,82.25 27.98,84.38 27.98,88.35 30.52,90.89 30.52,95.26 31.08,95.81 33.56,95.81 40.51,88.86 64.76,88.86 64.92,88.7 | 64.92,88.7 67.26,86.36 IC15.3 | IC15.11 69.8,93.98 69.8,93.67 64.92,88.8 64.92,88.7
N$12
  Top 0.254: LED1.K 5.08,7.75 7.83,5 R7.2
N$14  (via drill 0.35)
  Top 0.254: IC15.8 77.47,91.44 80.01,88.9 v80.01,76.2 | v83.82,76.2 87.63,72.39 87.63,55.88 86.36,54.61 86.36,46.99 87.63,45.72 IC4.5
  Bottom 0.254: v80.01,76.2 v83.82,76.2
N$19  (via drill 0.3)
  Top 0.254: v35.54,91.42 35.52,91.44 24.76,91.44 24.13,92.08 IC1.11
  Bottom 0.254: v35.54,91.42 37.12,91.42 40.26,88.29 50.26,88.29 50.76,87.8 50.76,79.09 52.02,77.83 52.02,72.44 IC3.6
OV_IN
  Top 0.254: R3.2 83.21,10.77 83.21,17.78 IC10.3
R2C2C3
  Top 0.254: C6.1 79.96,11.38 75.49,11.38 73.66,9.55 C5.+
  Bottom 0.254: C6.1 81.69,13.11 81.69,17.78 85.65,21.74 85.65,25.4 IC10.5
RI_WR
  Top 0.254: IC3.8 50.61,84.01 49.22,84.01 48.3,84.92 48.3,87.23 41.96,93.57 41.96,93.98 IC7.13
SCLK  (via drill 0.35)
  Top 0.254: JP6.2 92.71,55.88 v88.9,52.07
  Bottom 0.254: IC4.14 82.55,51.36 83.26,52.07 v88.9,52.07
SD_CLK  (via drill 0.3)
  Top 0.254: v56.39,52.22 55.44,52.22 54.67,51.46 54.67,47.73 51.75,44.8 48.97,44.8 v44.4,40.23 | IC12.4 IC12.5 V2.14
  Bottom 0.254: IC13.11 45.72,31.46 44.4,32.78 43.18,32.78 | 43.18,32.78 35.63,32.78 31.5,28.65 31.5,24.89 17.78,11.18 JP3.5 | V2.14 72.39,64.37 71.83,63.82 69.93,63.82 68.66,62.55 68.66,61.36 69.45,60.56 70.64,60.56 71.12,60.09 71.12,53.26 70.08,52.22 v56.39,52.22 | v44.4,40.23 43.18,39.01 43.18,32.78
SET595
  Top 0.254: IC13.12 43.18,29.57 54.7,41.09 54.7,43.31 59.63,48.23 59.63,51.49 63.46,55.32 72.01,55.32 73.66,56.97 73.66,60.65 75.16,62.15 79.79,62.15 81.27,63.63 81.27,68.13 79.35,70.06 76.93,70.06 76.17,70.83 76.17,78.7 IC12.8 77.32,79.96 75.49,81.79 69.39,81.79 67.67,80.06 67.36,80.06 IC12.12
SND0
  Bottom 0.254: IC6.19 50.8,47.66 52.44,46.02 91.27,46.02 92.71,47.47 IC4.10
SND1
  Bottom 0.254: IC6.18 53.34,50.37 54.6,51.63 66.37,51.63 67.41,50.59 67.41,48.12 68.28,47.24 80.44,47.24 81.32,48.13 81.32,52.29 82.41,53.37 89.5,53.37 90.17,52.7 IC4.11
SND2
  Bottom 0.254: IC6.17 55.88,47.66 57.11,46.43 86.44,46.43 87.63,47.62 IC4.12
SND3
  Bottom 0.254: IC6.16 58.42,47.82 59.4,46.84 84.3,46.84 85.09,47.62 IC4.13
SND4
  Top 0.254: IC6.15 60.96,51.24 61.66,51.94 79.34,51.94 80.01,51.28 IC4.15
SND5
  Top 0.254: IC4.1 77.42,41.96 73.73,41.96 70.53,45.16 65.44,45.16 63.5,47.1 IC6.14
SND6
  Top 0.254: IC4.2 80.01,43.81 78.1,45.73 68.05,45.73 66.04,47.73 IC6.13
SND7
  Top 0.254: IC4.3 82.55,44.61 80.71,46.45 70.02,46.45 68.58,47.89 IC6.12
SOUND_EN  (via drill 0.3)
  Top 0.254: IC7.12 44.5,93.98 47.68,90.8 58.86,90.8 60.23,89.44 60.23,70.48 61.91,70.48 65.56,66.83 65.56,63.18 66.75,61.99 70.16,61.99 v70.19,61.97
  Bottom 0.254: IC6.11 73.66,52.07 73.66,60.24 71.93,61.97 v70.19,61.97
VCC  (via drill 0.3)
  Top 0.406: C7.1 76.2,48.26 IC4.16 | IC12.14 62.28,80.06 62.28,86.36 IC15.1 62.08,86.46 62.08,91.64 60.96,92.76 | 82.7,92.86 82.7,80.37 | QG2.8 82.7,92.86 | 82.7,80.37 C2.1 | 60.96,92.76 58.42,92.76 C12.1 | 60.96,92.76 62.18,93.98 IC15.14 | 69.9,91.54 69.9,86.36 IC15.4 | 69.9,91.54 72.34,93.98 IC15.10 72.54,94.08 74.27,95.81 77.93,95.81 80.77,92.96 82.6,92.96 82.7,92.86 | IC15.13 65.02,93.98 67.36,91.64 69.8,91.64 69.9,91.54 | IC3.14 38.1,78.74 C1.1 35.56,79.69 32.67,82.58 17.49,82.58 16.51,81.6 IC14.14 | IC11.10 31.75,64.11 30.75,63.1 18.61,63.1 16.56,65.16 16.56,66.04 IC11.16 16.36,66.14 14.73,67.77 v14.73,68.24 | C11.1 47.04,48.26 48.26,49.48 IC6.20 | IC9.20 18.39,49.58 12.09,49.58 10.87,50.8 C4.1 | 18.49,35.56 18.49,32.72 20.32,30.89 20.32,29.16 21.54,27.94 SV1.4 | 18.49,35.56 18.49,37.39 RN1.1 | 22.05,43.18 21.44,43.79 20.52,43.79 19.81,43.08 19.81,40.95 18.9,40.03 8.23,40.03 5.99,37.8 5.99,36.58 7.42,35.15 7.42,34.44 X3.7 | 22.05,43.18 22.05,36.27 21.34,35.56 18.49,35.56 | IC13.16 31.8,26.72 29.87,26.72 C3.1 29.87,26.92 27.43,29.36 27.43,42.88 26.52,43.79 23.06,43.79 22.55,43.28 22.15,43.28 22.05,43.18 | IC13.10 48.26,26.19 49.06,25.4 v49.93,25.4 | V2.7 V2.10 | V2.10 82.55,80.21 82.7,80.37 | V2.10 V2.9
  Bottom 0.406: V2.7 82.55,56.45 77.52,51.42 77.52,49.58 IC4.16 | IC1.14 16.51,95.87 17.36,96.72 36.58,96.72 39.32,93.98 IC7.14 39.37,93.28 40.98,91.67 52.69,91.67 53.28,92.27 53.28,95.42 54.15,96.28 56.33,96.28 58.42,94.19 C12.1 | IC15.14 IC15.13 | 45.82,56.08 45.82,52.02 48.26,49.58 IC6.20 | 45.82,56.08 45.82,59.33 44.91,60.25 44.81,60.25 39.42,65.63 39.42,66.04 IC2.16 | IC11.10 31.8,66.04 31.8,63.8 38.2,57.4 38.2,55.07 45.01,48.26 C11.1 44.91,48.16 44.91,44.6 43.99,43.69 43.99,42.47 47.95,38.51 47.95,28.04 IC13.10 48.26,26.32 47.18,25.24 42,25.24 | v14.73,68.24 14.73,73.86 16.46,75.59 16.46,79.96 IC14.14 | JP1.2 10.77,52.73 10.77,50.8 C4.1 10.97,50.7 10.97,44.91 RN1.1 | 42,25.24 35.72,25.24 IC13.16 | R5.2 v49.93,25.4 | JP3.2 25.4,10.36 34.44,19.41 34.44,21.54 36.61,23.7 41.7,23.7 42,24.01 42,25.24 | 45.82,56.08 62,56.08 63.91,57.99 63.91,64.2 65.75,66.04 V2.16 67.31,68.02 66.28,69.06 62.15,69.06 60.88,70.33 60.88,75.17 62.23,76.52 IC12.14

## Text on the board
tPlace: 74HC11 | 74HC30 | 74HC74 | intern | extern | 74HC32 | 74HC04 | 74HC00 | Sound | 74HC163 | 74HC165 | 74HC138 | SN76489 | 74HC574 | 74HC574 | Minimal 64x4 / Expansion 1 Rev.4b / SN76489 Sound / Kempston Joystick Port / SD Card SPI | 74HC595 | /CS | SCK | MOSI | MISO | VCC | GND